# Altium PCB PCB1Good1.PcbDoc
Units mm, origin at the board's own origin, x right, y up, seen from the top; angles counter-clockwise.
Board outline 152.4 x 101.6 mm, 2 copper layers (Top Layer, Bottom Layer); 96 components, 119 nets, 457 pads, 86 vias.
Unrouted connection lines stored in the file: 1.
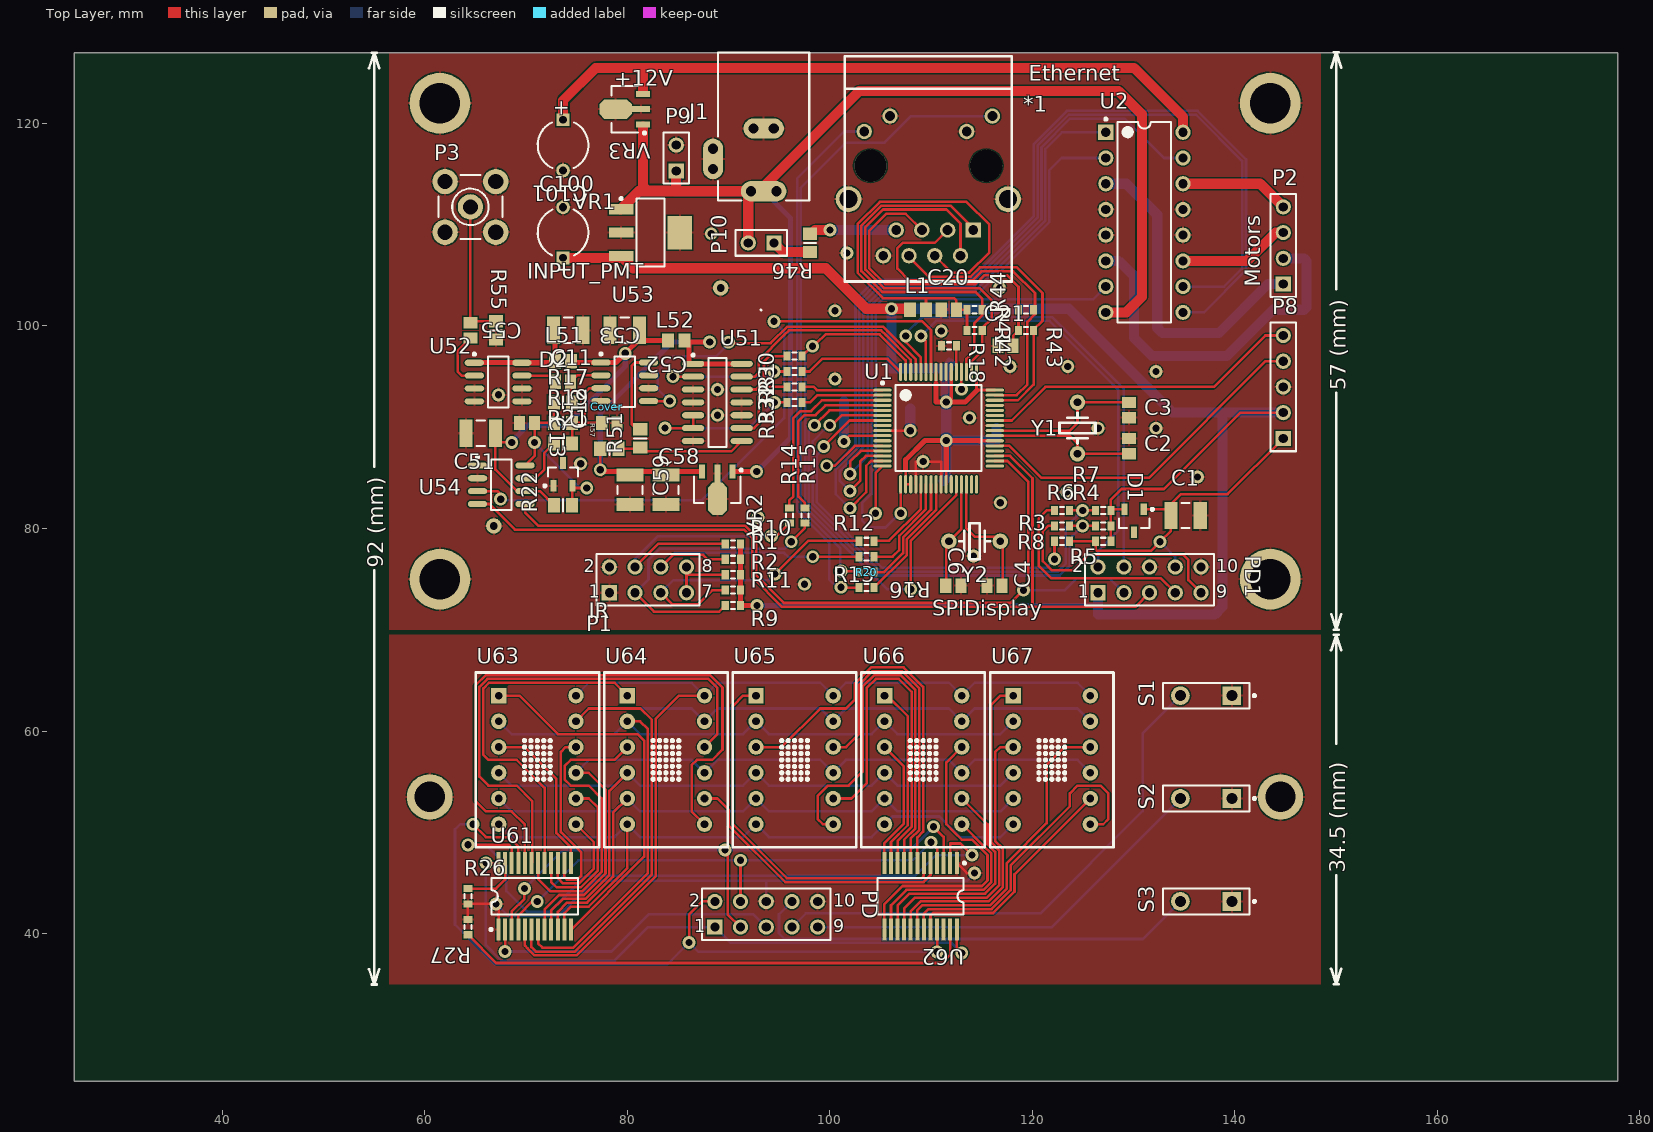
[diagram p0: Top Layer view]
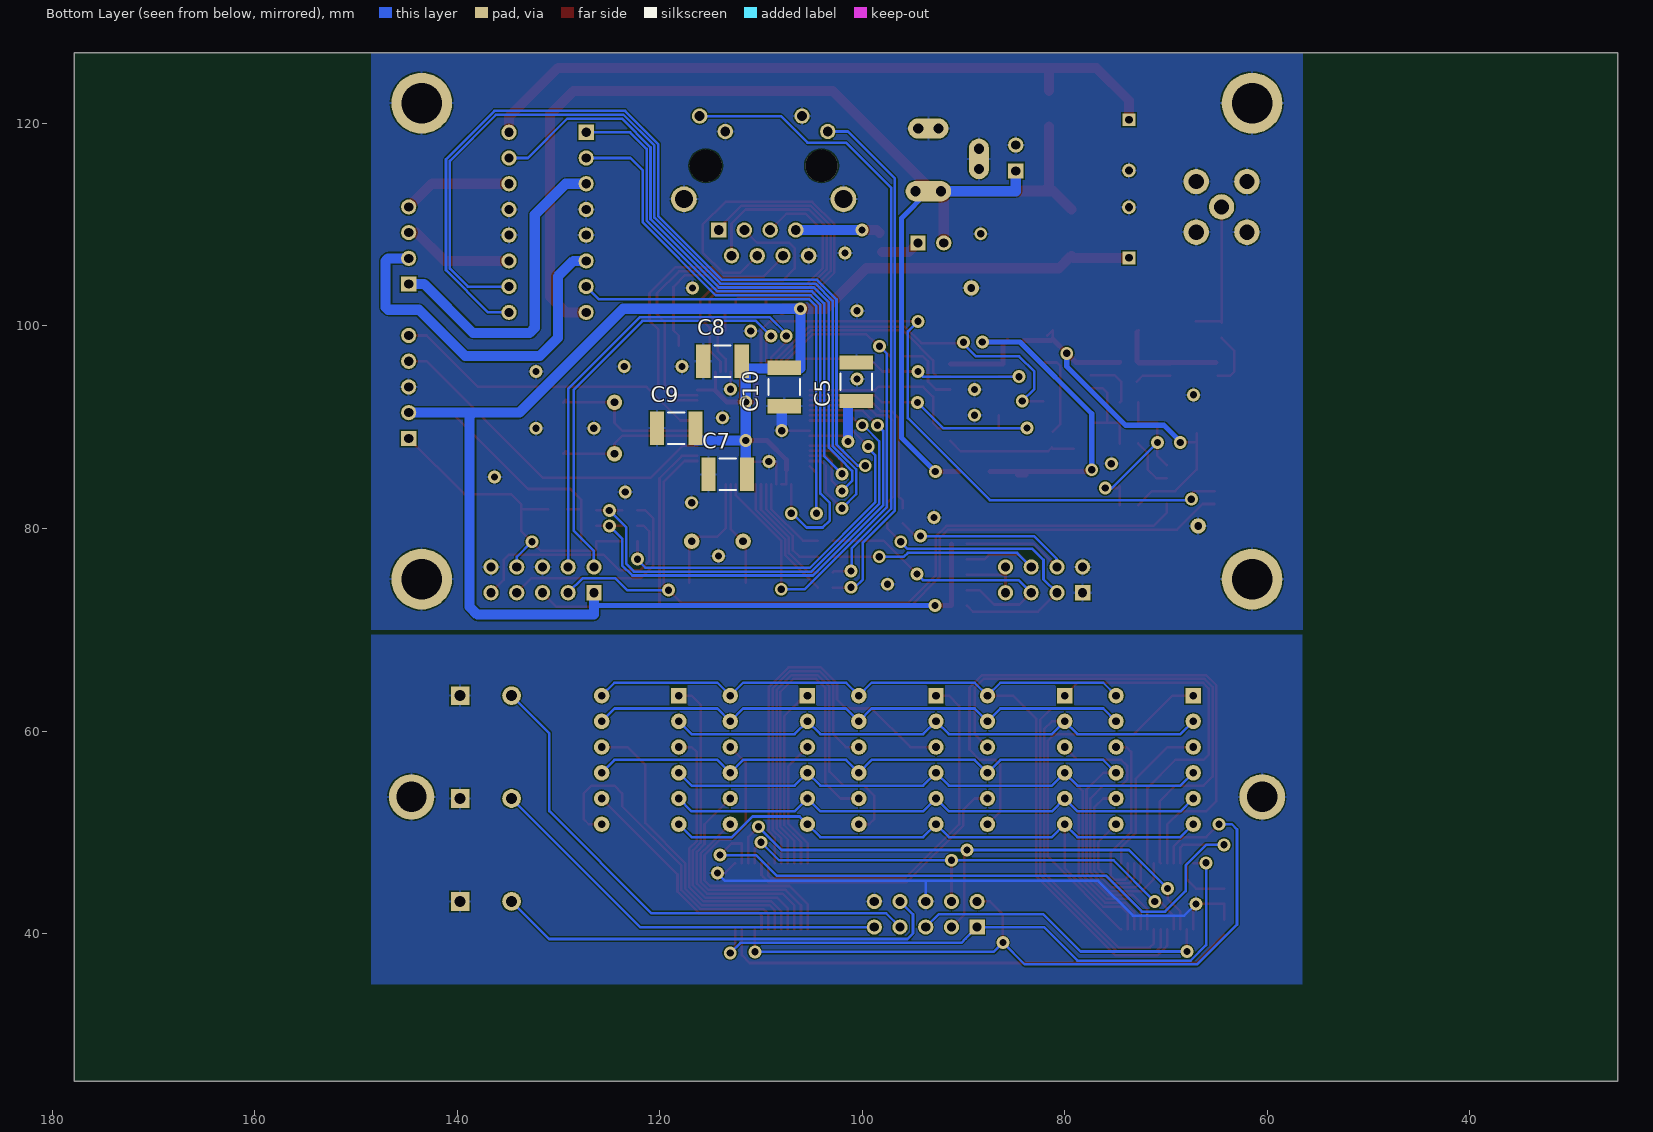
[diagram p1: Bottom Layer view, seen from below]

## Layer stack, top to bottom
Top Layer: signal copper 0.0356
Dielectric: dielectric 0.32, FR-4, Dk 4.8
Bottom Layer: signal copper 0.0356

## Board outline
25.4,25.4 177.8,25.4 177.8,127 25.4,127

## Design rules (kind name [scope] priority, off if disabled: settings)
Clearance [All] p1: gap=0.127
PolygonConnect [All] p1: connectstyle=Relief reliefconductorwidth=0.254 reliefentries=4 polygonreliefangle="90 Angle"
RoutingVias [All] p1: holewidth=0.711 width=1.27 viastyle="Through Hole" minholewidth=0.711 minwidth=1.27 maxholewidth=0.711 maxwidth=1.27
SilkscreenOverComponentPads [All] p1: minsilkscreentomaskgap=0.254
SolderMaskExpansion [All] p1: expansion=0.102
Width [All] p1: maxlimit=2.54 minlimit=0.254 preferedwidth=0.254
27 further rules are at their usual default settings.

## Classes and differential pairs
component class Sheet1: * *1 *2 *3 *4 *5 *6 *7 *8 C1 C2 C3 C4 C5 C6 C7 C8 C9 C10 C11 C12 C13 C51 C52 C53 C55 C58 C59 C100 C101 D1 D2 J1 J2 L51 L52 P1 P2 P3 P8 Q1 Q2 R1 R2 R3 R4 R5 R6 R7 R8 R9 R10 R11 R12 R13 R14 R15 R16 R17 R18 R19 R20 R21 R22 R23 R24 R25 R51 R55 R57 U1 U2 U3 U4 U51 U52 U53 U54 VR1 VR2 VR3 Y1 Y2

## Components (designator, comment, footprint, x,y, rotation, side; value= is the part's Value field where it differs from the comment)
*1 "Component_1" EthernetCON 109.728,115.824 r90 top
C1 "Cap" CAPC3225N 135.128,81.28 r180 top
C2 "Cap" CAPC2012L 129.54,88.138 r270 top
C3 "Cap" CAPC2012L 129.54,91.694 r270 top
C4 "Cap" CAPC2012L 116.259,74.357 r180 top
C5 "Cap" CAPC4532L 100.584,94.488 r90 bottom
C6 "Cap" CAPC2012L 112.195,74.357 r180 top
C7 "Cap" CAPC4532L 113.284,85.344 r180 bottom
C8 "Cap" CAPC4532L 113.792,96.52 r180 bottom
C9 "Cap" CAPC4532L 118.364,89.916 r180 bottom
C10 "Cap" CAPC4532L 107.696,93.98 r90 bottom
C11 "Cap" CAPC2012L 73.66,94.488 r0 top
C12 "Cap" CAPC2012L 78.232,90.424 r180 top
C13 "Cap" CAPC2012L 70.104,90.424 r0 top
C20 "Cap" CAPC2012L 111.76,101.6 r0 top
C21 "Cap" CAPC2012L 117.348,98.044 r0 top
C51 "Cap Pol1" CAPC3225N 65.532,89.408 r180 top
C52 "Cap" CAPC3225N 79.756,99.568 r180 top
C53 "Cap" CAPC3225N 74.168,99.568 r180 top
C55 "Cap" CAPC2012L 64.516,99.568 r270 top
C58 "Cap" CAPC3225N 83.82,83.82 r90 top
C59 "Cap Pol1" CAPC3225N 80.264,83.82 r270 top
C100 "Cap Pol1" CAPPR5-5x5 73.66,109.22 r90 top
C101 "Cap Pol1" CAPPR5-5x5 73.66,117.856 r270 top
Cover "Cover" Cover 77.724,92.456 r0 top
D1 "Diode" SOT95P240-3N 130.048,80.772 r270 top
D2 "AD1580" SOT95P240-3N 73.66,85.344 r90 top
J1 "PWR2.5" KLD-0202 93.472,127 r270 top
L1 "Inductor" INDC2012L 108.712,101.6 r0 top
L51 "Inductor" INDC2012L 73.66,96.52 r0 top
L52 "Inductor" INDC2012L 84.836,98.552 r0 top
P1 "Header 4X2" HDR2X4 78.232,73.66 r0 top
P2 "Header 4" HDR1X4 144.78,104.14 r90 top
P3 "SMB" SMB_V-RJ45 64.516,111.76 r0 top
P8 "Header 5" HDR1X5 144.78,88.9 r90 top
P9 "Header 2" HDR1X2 84.836,115.316 r90 top
P10 "Header 2" HDR1X2 94.488,108.204 r180 top
PD "Header 5X2" HDR2X5 88.646,40.64 r0 top
PD1 "Header 5X2" HDR2X5 126.492,73.66 r0 top
R1 "Res3" RESC1608L 90.424,78.486 r0 top
R2 "Res3" RESC1608L 90.424,76.962 r0 top
R3 "Res3" RESC1608L 122.936,80.264 r180 top
R4 "Res3" RESC1608L 127,80.264 r0 top
R5 "Res3" RESC1608L 127,78.74 r0 top
R6 "Res3" RESC1608L 122.936,81.788 r0 top
R7 "Res3" RESC1608L 127,81.788 r0 top
R8 "Res3" RESC1608L 122.936,78.74 r0 top
R9 "Res3" RESC1608L 90.424,72.39 r0 top
R10 "Res3" RESC1608L 90.424,73.914 r0 top
R11 "Res3" RESC1608L 90.424,75.438 r0 top
R12 "Res3" RESC1608L 103.632,78.74 r0 top
R13 "Res3" RESC1608L 103.632,77.216 r0 top
R14 "Res3" RESC1608L 96.012,81.28 r90 top
R15 "Res3" RESC1608L 97.536,81.28 r90 top
R16 "Res3" RESC1608L 103.632,74.168 r0 top
R17 "Res2" RESC2012N 73.66,92.456 r0 top
R18 "Res3" RESC1608L 111.76,98.044 r0 top
R19 "Res2" RESC2012N 73.66,90.424 r0 top
R20 "Res3" RESC1608L 103.632,75.692 r0 top
R21 "Res2" RESC2012N 73.66,88.392 r0 top
R22 "Res2" RESC2012N 73.66,82.296 r180 top
R26 "Res3" RESC1608L 64.262,43.688 r90 top
R27 "Res3" RESC1608L 64.262,40.64 r270 top
R30 "" RESC1608L 96.52,97.028 r180 top
R31 "" RESC1608L 96.52,95.504 r180 top
R32 "" RESC1608L 96.52,93.98 r180 top
R33 "" RESC1608L 96.52,92.456 r180 top
R41 "Res3" RESC1608L 114.3,101.6 r0 top
R42 "Res3" RESC1608L 114.3,99.568 r0 top
R43 "Res3" RESC1608L 119.38,99.568 r0 top
R44 "Res3" RESC1608L 119.38,101.6 r180 top
R46 "Res3" RESC2012N 98.044,108.204 r270 top
R51 "Res2" RESC2012N 81.28,88.9 r90 top
R55 "Res2" RESC2012N 67.056,99.568 r90 top
R57 "Res2" RESC2012N 78.232,87.884 r0 top
S1 "SW-PB" SPST-2 137.16,63.5 r180 top
S2 "SW-PB" SPST-2 137.16,53.34 r180 top
S3 "SW-PB" SPST-2 137.16,43.18 r180 top
U1 "PIC18F67J60-I/PT" TQFP-PT64_N 110.744,89.916 r0 top
U2 "SN754410NE" NE016 131.064,110.236 r0 top
U51 "SN74S197D" D014_N 88.9,92.456 r0 top
U52 "SA5205A" SOIC127P600-8L 67.252,94.465 r0 top
U53 "AD8561" SOIC127P600-8L 79.756,94.488 r0 top
U54 "AD8400" SOIC127P600-8L 67.564,84.328 r0 top
U61 "STP16C596" DB024 70.866,43.688 r0 top
U62 "STP16C596" DB024 108.966,43.688 r180 top
U63 "BL-M07A571" "LED matrix 7x5" 67.31,63.5 r0 top
U64 "BL-M07A571" "LED matrix 7x5" 80.01,63.5 r0 top
U65 "BL-M07A571" "LED matrix 7x5" 92.71,63.5 r0 top
U66 "BL-M07A571" "LED matrix 7x5" 105.41,63.5 r0 top
U67 "BL-M07A571" "LED matrix 7x5" 118.11,63.5 r0 top
VR1 "Volt Reg" SOT223-4N 82.296,109.22 r0 top
VR2 "Volt Reg" SOT89N#1 88.9,83.82 r270 top
VR3 "Volt Reg" SOT89N#2 79.756,121.412 r180 top
Y1 "XTAL" Quartz 124.46,92.456 r270 top
Y2 "Z" Quartz 116.84,78.74 r180 top

## Footprints (in the part's own frame and the unit in brackets; to place one, negate y for a bottom-side part, rotate by r counter-clockwise, add the part's x,y. Pads: shape width x height; smd on the part's side, far side on the other; paste and mask are expansions set on the pad)
CAPC2012L [mm] "Chip Capacitor, Body 2.0x1.3mm, IPC High Density"
  rect 1.1x1.4 smd: 1(-0.75,0) 2(0.75,0)
  body extent -1.1,-0.72 1.1,0.72, height 1.4
CAPC3225N [mm] "Chip Capacitor, Body 3.2x2.5mm, IPC Medium Density"
  rect 1.3x2.7 smd: 1(-1.45,0) 2(1.45,0)
  silkscreen extent -0.4,-1.25 0.4,1.25, body extent -1.7,-1.35 1.7,1.35, height 1.5
CAPC4532L [mm] "Chip Capacitor, Body 4.5x3.2mm, IPC High Density"
  rect 1.4x3.3 smd: 1(-1.9,0) 2(1.9,0)
  silkscreen extent -0.8,-1.55 0.8,1.55, body extent -2.4,-1.7 2.4,1.7, height 1.4
CAPPR5-5x5 [mm] "Capacitor, Electrolytic, Radial; Body 5 x 5 mm (Dia.xH typ); Pin Spacing 5 mm (typ)"
  rect 1.25x1.25 hole 0.75: 1(-2.5,0)
  round 1.35 hole 0.8: 2(2.5,0)
  silkscreen extent -2.26,-2.5 2.27,2.5
Cover [mil]
  round 60 hole 30: 0(-429.13,-480.32) 1(452.76,444.88)
  body extent -626,-486 646,453, height 181
D014_N [mm] "SOIC, 14-Leads, Body 8.7x3.9mm, Pitch 1.27mm, IPC Medium Density"
  oval 2.2x0.6 smd: 1(-2.4,3.81) 2(-2.4,2.54) 3(-2.4,1.27) 4(-2.4,0) 5(-2.4,-1.27) 6(-2.4,-2.54) 7(-2.4,-3.81) 8(2.4,-3.81) 9(2.4,-2.54) 10(2.4,-1.27) 11(2.4,0) 12(2.4,1.27) 13(2.4,2.54) 14(2.4,3.81)
  silkscreen extent -2.52,-4.4 0.9,4.78, body extent -2,-4.38 2,4.38, height 1.75
DB024 [mm] "SSOP, Plastic; 24 Leads; Body Width 5.3 mm; Pitch 0.65 mm"
  rect 0.4x2.15 smd: 1(-3.575,-3.275) 2(-2.925,-3.275) 3(-2.275,-3.275) 4(-1.625,-3.275) 5(-0.975,-3.275) 6(-0.325,-3.275) 7(0.325,-3.275) 8(0.975,-3.275) 9(1.625,-3.275) 10(2.275,-3.275) 11(2.925,-3.275) 12(3.575,-3.275) 13(3.575,3.275) 14(2.925,3.275) 15(2.275,3.275) 16(1.625,3.275) 17(0.975,3.275) 18(0.325,3.275) 19(-0.325,3.275) 20(-0.975,3.275) 21(-1.625,3.275) 22(-2.275,3.275) 23(-2.925,3.275) 24(-3.575,3.275)
  silkscreen extent -4.45,-3.4 4.25,1.8
EthernetCON [mil] "Ethernet connector w/two LEDs"
  rect 60x60 hole 38: 1(-250,-175)
  round 60 hole 38: 2(-350,-125) 3(-250,-75) 4(-350,-25) 5(-250,25) 6(-350,75) 7(-250,125) 8(-350,175) 9(193,-249) 10(133,-149) 11(193,149) 12(133,249)
  round 100 hole 70: 13(-130,-310) 14(-130,310)
  round 125 hole 125 unplated: 15(0,-225) 16(0,225)
  silkscreen extent -450,-325 425,325, body extent -450,-325 425,325, height 550
HDR1X2 [mm] "Connector; Header; 2 Position"
  rect 1.5x1.5 hole 0.9: 1(0,0)
  round 1.5 hole 0.9: 2(2.54,0)
  silkscreen extent -1.27,-1.27 3.81,1.27
HDR1X4 [mm] "Connector; Header; 4 Position"
  rect 1.5x1.5 hole 0.9: 1(0,0)
  round 1.5 hole 0.9: 2(2.54,0) 3(5.08,0) 4(7.62,0)
  silkscreen extent -1.27,-1.27 8.89,1.27
HDR1X5 [mm] "Connector; Header; 5 Position"
  rect 1.5x1.5 hole 0.9: 1(0,0)
  round 1.5 hole 0.9: 2(2.54,0) 3(5.08,0) 4(7.62,0) 5(10.16,0)
  silkscreen extent -1.27,-1.27 11.43,1.27
HDR2X4 [mm] "Connector; Header; 4x2 Position"
  rect 1.5x1.5 hole 0.9: 1(0,0)
  round 1.5 hole 0.9: 2(0,2.54) 3(2.54,0) 4(2.54,2.54) 5(5.08,0) 6(5.08,2.54) 7(7.62,0) 8(7.62,2.54)
  silkscreen extent -1.27,-1.27 8.89,3.81
HDR2X5 [mm] "Connector; Header; 5x2 Position"
  rect 1.5x1.5 hole 0.9: 1(0,0)
  round 1.5 hole 0.9: 2(0,2.54) 3(2.54,0) 4(2.54,2.54) 5(5.08,0) 6(5.08,2.54) 7(7.62,0) 8(7.62,2.54) 9(10.16,0) 10(10.16,2.54)
  silkscreen extent -1.27,-1.27 11.43,3.81
INDC2012L [mm] "Chip Inductor, Body 2.0x1.2mm, IPC High Density"
  rect 1.2x1.4 smd: 1(-0.8,0) 2(0.8,0)
  body extent -1.1,-0.7 1.1,0.7, height 0.55
KLD-0202 [mm] "DC Power Jack, 2.5mm, KLD Series, PCB Mount"
  oval 2x4.5 all layers, no hole: 1(13.7,0)
  round 1.5 hole 1: 1A(13.7,-1.25) 1B(13.7,1.25) 2A(7.5,-1) 2B(7.5,1) 3A(9.5,-5) 3B(11.5,-5)
  oval 2x4 all layers, no hole: 2(7.5,0)
  oval 4x2 all layers, no hole: 3(10.5,-5)
  silkscreen extent 0,-4.5 14.6,4.5
"LED matrix 7x5" [mil] "LED matrix 7x5"
  rect 60x60 hole 30: 1(0,0)
  round 60 hole 30: 2(0,-100) 3(0,-200) 4(0,-300) 5(0,-400) 6(0,-500) 7(300,-500) 8(300,-400) 9(300,-300) 10(300,-200) 11(300,-100) 12(300,0)
  silkscreen extent -90,-590 390,90, body extent -90,-590 390,90, height 250
NE016 [mm] "DIP, 16-Leads, Row Spacing 7.62mm, Pitch 2.54mm, Body 19.4x6.35mm"
  rect 1.5x1.5 hole 0.9: 1(-3.81,8.89)
  round 1.5 hole 0.9: 2(-3.81,6.35) 3(-3.81,3.81) 4(-3.81,1.27) 5(-3.81,-1.27) 6(-3.81,-3.81) 7(-3.81,-6.35) 8(-3.81,-8.89) 9(3.81,-8.89) 10(3.81,-6.35) 11(3.81,-3.81) 12(3.81,-1.27) 13(3.81,1.27) 14(3.81,3.81) 15(3.81,6.35) 16(3.81,8.89)
  silkscreen extent -3.93,-9.9 2.65,10.31, body extent -3.3,-9.9 3.3,9.9, height 5.08
Quartz [mil]
  round 60 hole 30: 1(0,0) 2(200,0)
  silkscreen extent 40,-70 160,70, body extent -100,-100 300,100, height 90
RESC1608L [mm] "Chip Resistor, Body 1.6x0.8mm, IPC High Density"
  rect 0.7x0.9 smd: 1(-0.75,0) 2(0.75,0)
  silkscreen extent -0.2,-0.35 0.2,0.35, body extent -0.85,-0.48 0.85,0.48, height 0.9
RESC2012N [mm] "Chip Resistor, Body 2.0x1.2mm, IPC Medium Density"
  rect 1.2x1.4 smd: 1(-0.9,0) 2(0.9,0)
  silkscreen extent 0,-0.6 0,0.6, body extent -1.07,-0.7 1.07,0.7, height 0.7
SMB_V-RJ45 [mm] "Connector; SMB Straight"
  round 2.5 hole 1.5: 1(0,0) 2(-2.5,-2.5) 2_1(2.5,-2.5) 2_2(2.5,2.5) 2_3(-2.5,2.5)
  silkscreen extent -3.15,-3.15 3.15,3.15
SOIC127P600-8L [mm] "SOIC, 8-Leads, Body 4.9x3.9mm, Pitch 1.27mm, IPC High Density"
  oval 1.9x0.6 smd: 1(-2.35,1.905) 2(-2.35,0.635) 3(-2.35,-0.635) 4(-2.35,-1.905) 5(2.35,-1.905) 6(2.35,-0.635) 7(2.35,0.635) 8(2.35,1.905)
  silkscreen extent -2.47,-2.5 1,2.88, body extent -2,-2.5 2,2.5, height 1.75
SOT89N#1 [mm] "SOT89, 3-Leads, Body 4.5x2.4 mm, Pitch 1.5mm, Lead Span 4.1mm, IPC Medium Density"
  rect 1.4x0.6 smd: 1(-1.8,1.5) 3(-1.8,-1.5)
  rect 1.8x0.6 smd: 2(-1.6,0)
  oct 3.2x1.9 smd: 2_1(0.9,0)
  silkscreen extent -2.07,-2.3 1.3,2.48, body extent -1.3,-2.3 1.3,2.3, height 1.6
SOT89N#2 [mm] "SOT89, 3-Leads, Body 4.5x2.4 mm, Pitch 1.5mm, Lead Span 4.1mm, IPC Medium Density"
  rect 1.4x0.6 smd: 1(-1.8,1.5) 3(-1.8,-1.5)
  oct 3.2x1.9 smd: 2(0.9,0)
  rect 1.8x0.6 smd: 2_1(-1.6,0)
  silkscreen extent -2.07,-2.3 1.3,2.47, body extent -1.3,-2.3 1.3,2.3, height 1.6
SOT95P240-3N [mm] "SOT23, 3-Leads, Body 2.9x1.3mm, Pitch 0.95mm, Lead Span 2.4mm, IPC Medium Density"
  rect 1.15x0.6 smd: 1(-1.125,0.95) 2(-1.125,-0.95) 3(1.125,0)
  silkscreen extent -1.25,-1.5 0.7,1.93, body extent -0.7,-1.5 0.7,1.5, height 1.14
SOT223-4N [mm] "SOT223, 4-Leads, Body 6.5x3.5mm, Pitch 2.3mm, Lead Span 7mm, IPC Medium Density"
  rect 2.4x1 smd: 1(-2.9,2.3) 2(-2.9,0) 3(-2.9,-2.3)
  rect 2.4x3.3 smd: 4(2.9,0)
  silkscreen extent -3.02,-3.35 1.4,3.47, body extent -1.85,-3.35 1.85,3.35, height 1.7
SPST-2 [mm] "Circuit Breaker; 2 Leads"
  rect 1.85x1.85 hole 1.1: 1(-2.54,0)
  round 1.85 hole 1.1: 2(2.54,0)
  silkscreen extent -4.89,-1.27 4.28,1.27
TQFP-PT64_N [mm] "Thin QFP, 64-Leads, Body 10x10mm, Pitch 0.5mm, IPC Medium Density"
  oval 1.8x0.3 smd: 1(-5.55,3.75) 2(-5.55,3.25) 3(-5.55,2.75) 4(-5.55,2.25) 5(-5.55,1.75) 6(-5.55,1.25) 7(-5.55,0.75) 8(-5.55,0.25) 9(-5.55,-0.25) 10(-5.55,-0.75) 11(-5.55,-1.25) 12(-5.55,-1.75) 13(-5.55,-2.25) 14(-5.55,-2.75) 15(-5.55,-3.25) 16(-5.55,-3.75) 33(5.55,-3.75) 34(5.55,-3.25) 35(5.55,-2.75) 36(5.55,-2.25) 37(5.55,-1.75) 38(5.55,-1.25) 39(5.55,-0.75) 40(5.55,-0.25) 41(5.55,0.25) 42(5.55,0.75) 43(5.55,1.25) 44(5.55,1.75) 45(5.55,2.25) 46(5.55,2.75) 47(5.55,3.25) 48(5.55,3.75)
  oval 0.3x1.8 smd: 17(-3.75,-5.55) 18(-3.25,-5.55) 19(-2.75,-5.55) 20(-2.25,-5.55) 21(-1.75,-5.55) 22(-1.25,-5.55) 23(-0.75,-5.55) 24(-0.25,-5.55) 25(0.25,-5.55) 26(0.75,-5.55) 27(1.25,-5.55) 28(1.75,-5.55) 29(2.25,-5.55) 30(2.75,-5.55) 31(3.25,-5.55) 32(3.75,-5.55) 49(3.75,5.55) 50(3.25,5.55) 51(2.75,5.55) 52(2.25,5.55) 53(1.75,5.55) 54(1.25,5.55) 55(0.75,5.55) 56(0.25,5.55) 57(-0.25,5.55) 58(-0.75,5.55) 59(-1.25,5.55) 60(-1.75,5.55) 61(-2.25,5.55) 62(-2.75,5.55) 63(-3.25,5.55) 64(-3.75,5.55)
  silkscreen extent -5.67,-4.25 4.25,4.57, body extent -5,-5 5,5, height 1.2

## Part data
C1 C2 C3 C4 C5 C6 C7 C8 C9 C10 C11 C12 C13 C20 C21 C52 C53 C55 C58: "Capacitor"
C51 C59 C100 C101: "Polarized Capacitor (Radial)"
Cover: library part Component_1
D1: "Default Diode"
D2: library part "D Zener", "Zener Diode"
J1: "Low Voltage Power Supply Connector"
P1: "Header, 4-Pin, Dual row"
P2: "Header, 4-Pin"
P3: "SMB Straight Connector"
P8: "Header, 5-Pin"
P9 P10: "Header, 2-Pin"
PD PD1: "Header, 5-Pin, Dual row"
R1 R2 R3 R4 R5 R6 R7 R8 R9 R10 R11 R12 R13 R14 R15 R16 R17 R18 R19 R20 R21 R22 R26 R27 R41 R42 R43 R44 R46 R51 R55 R57: "Resistor"
R30 R31 R32 R33: library part Res3, "Resistor"
S1 S2 S3: "Switch"
U1: "High Performance, 1-Mbit Flash Microcontroller with Ethernet, 128K Flash, 64-Pin TQFP, Industrial Temperature Range"
U2: "Quadruple Half-H Driver"
U51: "100-MHz Presettable Decade or Binary Counter / Latch"
U52: "Wide-band high-frequency amplifier"
U53: "Ultrafast 7 ns  Single Supply Comparator"
U54: "Digital Potentiometers"
VR1 VR2 VR3: "Voltage Regulator"
Y1: "Crystal Oscillator"
Y2: library part XTAL, "32768 kHz"

## Free pads (board coordinates)
  round 4.5 hole 3: 0(60.5,53.5) 0(144.5,53.5)
  round 6 hole 4: 0(61.5,75) 0(61.5,122) 0(143.5,75) 0(143.5,122)

## Via types
v1: diameter 1.27, hole 0.711, Top Layer to Bottom Layer, 85 vias
v2: diameter 1.27, hole 0.711, Top Layer to Bottom Layer, tented top, 1 vias

## Nets (pads, with @x,y where several pads share a name; then routed paths per layer and width w, separated by ;. In a path a pad name is that pad's centre, name@x,y a point inside that pad or via, vN(x,y) a via of type N, cw(c..) or ccw(c..) an arc to the next point about the centre after c; other vN are vias at no path point)
3.3V: C7.2 C8.2 C9.2 C10.2 C100.1 D1.2 L1.1 P8.2 PD1.1 R1.2 R2.2 R4.2 R5.2 R7.2 R9.2 R10.2 R11.2 U1.18 U1.19 U1.26 U1.38 U1.48 U1.49 U1.54 U1.57 VR1.3 | length 244
  Top Layer w0.254: 107.494,85.789 U1.18 U1.19 ; U1.26 111.5,84.372 111.5,85.8 ; U1.49@114.494,94.802 U1.49 ; R5.2 R4.2 R7.2 ; D1.2 127.859,81.897 R7.2 ; P8.2 140.54,91.44 133,83.9 128.8,83.9 127.75,82.85 R7.2
  Top Layer w0.3: 110.494,94.3 U1.57 ; 111.994,93.1 111.994,92.5 U1.54 ; 114.494,93.7 U1.49 ; 114.528,93.666 U1.48 ; 114.8,88.666 U1.38
  Top Layer w0.5: R1.2 R2.2 R11.2 R10.2 R9.2 v1(92.8,72.39) ; 107.494,85.789 107.494,86.794 109.4,88.7 v1(111.5,88.7) ; 110.494,94.3 110.494,92.5 111.994,92.5 113.362,92.5 114.528,93.666 ; 111.5,85.8 v1(111.5,88.7) ; 114.8,88.666 114.766,88.7 v1(111.5,88.7)
  Top Layer w1: C100.1 79.146,106.72 79.346,106.92 80.566,105.7 99.6,105.7 103.6,101.7 v1(106.1,101.7) ; v1@106.2,101.6 v1(106.1,101.7) ; L1.1 107.812,101.7 v1(106.1,101.7)
  Bottom Layer w0.5: v1(92.8,72.39) 126.482,72.39 126.492,72.4
  Bottom Layer w0.508: C8.2@111.76,95.8 C8.2@111.76,96.652 ; C8.2@111.892,96.292 C8.2
  Bottom Layer w1: C7.2@111.252,84.704 111.5,84.952 v1(111.5,88.7) ; C8.2@111.76,95.8 106.1,95.8 v1(106.1,101.7) 123.6,101.7 133.86,91.44 138.46,91.44 ; C8.2@111.892,96.292 111.5,95.9 111.5,93.1 v1(111.5,88.7) ; C9.2 116.464,88.7 v1(111.5,88.7) ; PD1.1 126.492,72.4 126.492,71.5 138,71.5 138.76,72.26 138.76,91.14 138.46,91.44 ; P8.2 138.46,91.44
  other v1: 111.5,92.5
5V: C101.1 U2.16 VR3.3 | length 70.2
  Top Layer w1: C101.1 73.66,122.26 76.876,125.476 81.556,125.476 ; VR3.3@81.556,123.2 81.556,125.476 ; U2.16 134.874,120.65 130.048,125.476 81.556,125.476
5VHF: C58.2 C59.1 L52.2 R57.1 U51.1 U51.14 VR2.3 | length 43.4
  Top Layer w0.254: R57.1 v1(77.332,85.8) 77.332,85.368 v1@77.43,85.27
  Top Layer w0.5: v1(77.332,85.8) 77.512,85.62 VR2.3 ; C58.2@84.17,85.62 C58.2 C58.2@84.67,85.27 ; L52.2 85.763,98.425 L52.2@86.116,98.425 ; v1(88.138,98.425) L52.2@86.116,98.425 ; U51.14 86.116,96.266 L52.2@86.116,98.425
  Bottom Layer w0.254: v1(77.332,85.8) 77.356,85.8 v1@77.4,85.844
  Bottom Layer w0.5: v1(77.332,85.8) 77.332,91.332 84.425,98.425 v1(88.138,98.425)
12V: J1.1 J1.1A J1.1B P9.1 P10.2 U2.8 VR1.1 VR2.1 VR3.1 | length 140.2
  Top Layer w0.5: VR2.1 v1(92.78,85.62) v1@92.8,85.6
  Top Layer w0.508: J1.1A J1.1
  Top Layer w1: VR1.1@79.346,111.52 81.126,113.3 84.2,113.3 ; VR3.1@81.556,119.7 81.556,113.8 81.976,113.38 84.12,113.38 84.2,113.3 ; P9.1 84.8,115.28 84.8,113.3 ; P10.2 91.948,113.026 J1.1A 84.8,113.3 ; J1.1 93.472,113.772 102.89,123.19 128.524,123.19 130.81,120.904 130.81,102.87 129.286,101.346 U2.8 ; 84.2,113.3 84.8,113.3
  Bottom Layer w0.5: J1.1A J1.1 96.1,110.672 96.1,88.94 v1(92.78,85.62)
  Bottom Layer w1: P9.1 84.836,113.3 J1.1
COUNTERRESET: U1.62 U51.13 | length 21.7
  Top Layer w0.254: U51.13 92.596,94.996 93,95.4 93,96.6 95.5,99.1 95.962,99.562 105.077,99.562 105.539,99.1 107.994,96.645 U1.62
D0: R33.2 U51.5 U51.6 | length 17.2
  Top Layer w0.254: v1(83.72,89.916) U51.6 U51.5 ; v1(94.544,92.456) R33.2
  Bottom Layer w0.254: v1(83.72,89.916) 92.004,89.916 v1(94.544,92.456)
D1: R32.2 U51.9 | length 8.7
  Top Layer w0.254: U51.9@92.316,89.916 U51.9 92.516,89.916 93,90.4 93,93 93.98,93.98 R32.2
D2: R31.2 U51.2 | length 13.5
  Top Layer w0.254: v1(84.504,94.996) U51.2 ; v1(94.504,95.504) R31.2
  Bottom Layer w0.254: v1(84.504,94.996) 93.996,94.996 v1(94.504,95.504)
D3: R30.2 U51.12 | length 7
  Top Layer w0.254: U51.12 92.726,93.726 93.5,94.5 93.5,96.5 94.028,97.028 R30.2
DISP_LE: PD1.2 U1.59 | length 45
  Top Layer w0.254: v1(109,99) 109.494,98.506 U1.59
  Bottom Layer w0.254: v1(109,99) 110.5,100.5 121.7,100.5 128.5,93.7 128.5,79.8 126.492,77.792 PD1.2
DISPOFF: PD1.4 U1.60 | length 47.1
  Top Layer w0.254: v1(107.5,99) 107.5,98.4 108.994,96.906 U1.60
  Bottom Layer w0.254: v1(107.5,99) 107.5,99.25 109.131,100.881 121.919,100.881 129.032,93.768 PD1.4
ENABLECOUNT: U1.61 U53.5 | length 35.7
  Top Layer w0.254: U53.5 v1(84.201,92.583) ; v1@90,98.679 90.379,98.3 94.161,98.3 95.804,99.943 96.642,99.943 105.235,99.943 105.678,99.5 108.494,96.684 U1.61
  Bottom Layer w0.254: v1(84.201,92.583) 83,93.784 83,95.5 84.5,97 88.768,97 90,98.232 v1(90,98.4)
GND: *1.8 *1.10 *1.11 *1.13 *1.14 C1.1 C2.1 C3.2 C4.2 C5.2 C6.1 C7.1 C8.1 C9.1 C10.1 C12.1 C13.1 C20.1 C21.1 C51.2 C52.2 C53.1 C58.1 C59.2 C100.2 C101.2 Cover.0 Cover.1 D2.1 J1.2 J1.2A J1.2B J1.3 J1.3A J1.3B P1.1 P1.2 P3.2 P3.2_1 P3.2_2 P3.2_3 P8.3 P9.2 pad.0 PD1.6 PD1.10 PD.6 PD.10 R18.1 R26.1 R27.1 R55.1 S1.1 S2.1 S3.1 U1.9 U1.20 U1.25 U1.41 U1.45 U1.52 U1.55 U1.56 U2.4 U2.5 U2.12 U2.13 U51.3 U51.4 U51.7 U51.10 U51.11 U52.3 U52.4 U52.5 U52.6 U53.4 U53.6 U54.1 U54.2 U61.1 U62.1 VR1.2 VR1.4 VR2.2 VR2.2_1 VR3.2 VR3.2_1 | length 74.6
  Top Layer w0.254: R27.1 R26.1 v1(67.044,42.938) 67.291,42.691 U61.1 ; U1.9 v1@107.946,89.666 ; U1.20 108.494,85.587 108.498,85.591 108.498,86.614 v1(109.22,86.614) 110.994,86.614 U1.25 ; U62.1@112.541,46.959 113.532,45.968 v1(114.3,45.974) ; U1.52 112.994,93.756 v1(113,93.75)
  Bottom Layer w0.254: v1(67.044,42.938) 68.199,41.783 73.279,41.783 76.708,45.212 93.726,45.212 ; PD.6 93.726,45.212 ; C10.1 C10.1@107.95,91.826 ; v1(114.3,45.974) 113.538,45.212 98.806,45.212 93.726,45.212
  Bottom Layer w1: v1(107.95,89.662) C10.1@107.95,91.826
  other v1: 97.5,74.5 114.2,77.3 92.9,81.1 116.84,82.55 123.4,83.6 136.3,85.1 75.4,86.4 126.5,89.9 132.2,89.9 113.792,90.932 88.9,91.186 67.3,93.2 88.9,93.726 100.5,94.75 132.2,95.5 117.8,96 123.5,96 111,99.5 100.5,101.5 116.75,103.75 101.7,107.2 88.3,109.1
INPUT: C55.1 P3.1 R55.2 | length 14
  Top Layer w0.254: P3.1 C55.1 64.666,100.468 R55.2
Net*1_1: *1.1 R41.2 U1.51 | length 38.4
  Top Layer w0.254: U1.51 113.494,96.744 114.25,97.5 114.25,100.25 115.05,101.05 115.05,102.7 114.393,103.357 109.682,103.357 105.182,103.357 103.124,105.415 103.124,109.913 105.092,111.881 111.924,111.881 114.173,109.632 *1.1
Net*1_2: *1.2 R42.2 U1.50 | length 39.7
  Top Layer w0.254: *1.2 112.903,110.109 111.512,111.5 105.25,111.5 103.505,109.755 103.505,105.573 105.34,103.738 109.16,103.738 114.762,103.738 116,102.5 116,100.75 115.05,99.8 115.05,97.55 113.994,96.494 U1.50
Net*1_3: *1.3 R44.1 U1.47 | length 36
  Top Layer w0.254: 107.832,104.5 111.719,104.5 112.078,104.5 114.078,104.5 114.979,105.401 118.099,105.401 120.262,103.238 120.262,101.176 119.5,100.414 119.5,97.813 119.5,94.227 118.439,93.166 U1.47 ; 107.832,104.512 106.68,105.664 106.68,107.696 107.188,108.204 110.363,108.204 *1.3
Net*1_4: *1.4 C20.2 L1.2 R41.1 R42.1 | length 45.2
  Top Layer w0.254: L1.2@109.5,101.612 109.5,102.75 ; *1.4 112.035,105.262 113.762,105.262 115.75,107.25 115.75,110 113.488,112.262 104.934,112.262 102.743,110.071 102.743,105.257 105.25,102.75 109.5,102.75 ; R42.1 113.55,101.45 113.4,101.6 C20.2 112.5,101.61 112.5,102.5 112.25,102.75 109.5,102.75
Net*1_5: *1.5 C21.2 R43.1 R44.2 | length 32.5
  Top Layer w0.254: *1.5 107.5,111.067 105.567,111.067 103.886,109.386 103.886,105.73 105.497,104.119 114.369,104.119 115.27,105.02 117.48,105.02 118.63,103.87 R44.2 R43.1 118.098,99.036 C21.2
Net*1_6: *1.6 R43.2 U1.46 | length 29.4
  Top Layer w0.254: *1.6 107.823,106.807 109.725,104.905 ; 109.725,104.881 111.877,104.881 112.235,104.881 113.92,104.881 114.821,105.782 118.468,105.782 121,103.25 121,100.5 120.13,99.63 120.13,98.001 120.13,94.222 118.574,92.666 U1.46
Net*1_7: *1.7 R46.1 | length 8.4
  Top Layer w1: R46.1@98.295,109.205 98.564,109.474 v1(100.026,109.474)
  Bottom Layer w1: v1(100.026,109.474) *1.7
Net*1_9: *1.9 R20.1 | length 63.5
  Top Layer w0.254: v1(101.1,75.8) 102.774,75.8 R20.1
  Bottom Layer w0.254: v1@101.051,75.751 101.051,78.049 97.149,81.951 97.149,113.659 101.6,118.11 105.41,118.11 108.026,120.726 *1.9 ; *1.9@115.824,120.65 *1.9@116.078,120.396
Net*1_12: *1.12 R16.1 | length 52.7
  Top Layer w0.254: v1(101.1,74.2) 101.132,74.168 R16.1
  Bottom Layer w0.254: v1(101.1,74.2) 100.7,74.2 99.933,74.967 99.933,78.6 96.768,81.765 96.768,114.548 101.422,119.202 *1.12
NetC1_2: C1.2 D1.1 P8.1 PD1.8 R5.1 R8.2 | length 34.2
  Top Layer w0.254: R8.2 R5.1 126.25,77.95 126.4,77.8 131.7,77.8 v1(132.6,78.7) 133.678,79.778 C1.2 C1.2@133.678,81.4 ; D1.1 C1.2@133.569,81.897 ; C1.2@133.678,81.788 C1.2@133.678,81.4 ; P8.1 139.28,83.4 134.66,83.4 133.678,82.418 C1.2@133.678,81.4
  Bottom Layer w0.254: v1(132.6,78.7) 134.112,77.188 PD1.8
NetC2_2: C2.2 U1.39 Y1.2 | length 14.7
  Top Layer w0.254: U1.39 123.686,89.166 124.46,88.392 Y1.2 C2.2@129.298,87.376 ; C2.2@129.298,87.63 C2.2
NetC3_1: C3.1 U1.40 Y1.1 | length 15.7
  Top Layer w0.254: U1.40 123.702,89.666 124.46,90.424 Y1.1 C3.1@129.274,92.456 ; C3.1@129.274,92.71 C3.1
NetC4_1: C4.1 U1.30 Y2.1 | length 12.4
  Top Layer w0.254: U1.30 113.494,80.006 114.3,79.2 116.38,79.2 117.082,78.498 C4.1@117.082,74.667
NetC5_1: C5.1 U1.10 | length 8
  Top Layer w0.254: v1(101.4,88.6) 101.966,89.166 U1.10 U1.10@105.182,89.154
  Bottom Layer w1: v1(101.4,88.6) C5.1@101.4,92.6
NetC6_2: C6.2 U1.29 Y2.2 | length 10.3
  Top Layer w0.254: C6.2@111.518,74.667 111.518,78.498 Y2.2 112.994,79.974 U1.29
NetC11_1: C11.1 U52.7 | length 3.6
  Top Layer w0.254: U52.7 72.298,95.1 C11.1
NetC11_2: C11.2 R17.2 U53.2 | length 5.4
  Top Layer w0.254: R17.2 74.41,92.606 C11.2 75.045,95.123 U53.2
NetC12_2: C12.2 R19.2 R21.2 U53.3 | length 9.7
  Top Layer w0.254: R21.2 R19.2 C12.2 ; 75.8,90.424 75.8,93.4 76.253,93.853 U53.3
NetC13_2: C13.2 D2.2 R17.1 R19.1 R22.1 U54.8 | length 19
  Top Layer w0.254: U54.8@69.914,86.314 U54.8 70.854,87.173 v1(70.854,88.5) C13.2 R19.1 ; R19.1@72.71,90.374 R19.1 ; R17.1 R19.1 ; R22.1 D2.2@74.56,84.169 ; D2.2 74.829,84 v1(76,84)
  Bottom Layer w0.254: v1(70.854,88.5) 75.354,84 v1(76,84)
NetC51_1: C51.1 C52.1 L51.2 L52.1 R22.2 U53.1 U54.6 | length 40.8
  Top Layer w0.254: C51.1 C51.1@66.982,88.5 ; v1@68.8,88.5 v1(68.6,88.5) C51.1@66.982,88.5 ; R22.2 71.363,83.693 U54.6 69.107,83.693 66.982,85.818 C51.1@66.982,88.5 ; L51.2 L51.2@74.587,96.393 ; U53.1@77.221,96.451 77.279,96.393 U53.1 ; C52.1@81.36,98.552 81.206,98.706 C52.1 C52.1@81.714,99.06
  Top Layer w0.5: L51.2@74.587,96.393 U53.1@77.279,96.393 ; U53.1 78.893,96.393 v1(79.8,97.3) C52.1@81.206,98.706 ; C52.1@81.36,98.552 L52.1
  Bottom Layer w0.254: v1(68.6,88.5) 68.7,88.4 v1@68.7,88.7
  Bottom Layer w0.5: v1@68.7,88.7 70.2,90.2 74,90.2 79.8,96 v1(79.8,97.3)
NetC53_2: C53.2 L51.1 U52.1 U52.8 | length 11.6
  Top Layer w0.254: U52.8@70.061,96.266 U52.8@70.315,96.52 ; L51.1@72.71,96.37 L51.1 ; C53.2 C53.2@72.86,99.426
  Top Layer w0.5: U52.1@65.087,96.393 U52.8@69.934,96.393 ; U52.8 L51.1@72.71,96.37 ; L51.1 C53.2@72.86,99.426
NetC55_2: C55.2 U52.2 | length 5.7
  Top Layer w0.254: C55.2 63.246,97.548 63.246,95.504 63.65,95.1 U52.2
NetP1_3: P1.3 R9.1 R15.1 | length 31.1
  Top Layer w0.254: P1.3 82.632,71.8 89.084,71.8 R9.1 ; v1@96.266,78.74 96.226,78.7 v1(96.2,78.7) 97.536,80.036 R15.1
  Bottom Layer w0.254: P1.3 82.1,74.988 82.1,76.9 83.2,78 95.526,78 96.226,78.7 v1(96.2,78.7)
NetP1_4: P1.4 R1.1 R14.1 | length 27.3
  Top Layer w0.254: P1.4 83.058,78.486 R1.1 ; v1(94.234,79.248) 94.73,79.248 R14.1
  Bottom Layer w0.254: P1.4 80.772,76.972 83.048,79.248 v1(94.234,79.248)
NetP1_5: P1.5 R10.1 R12.1 | length 29.1
  Top Layer w0.254: P1.5 84.472,72.5 86.986,72.5 88.4,73.914 R10.1 ; v1(94.6,75.5) 97.9,78.8 R12.1@102.882,78.8
  Bottom Layer w0.254: P1.5 84.552,74.9 87,74.9 94,74.9 v1(94.6,75.5)
NetP1_6: P1.6 R2.1 R13.1 | length 27.3
  Top Layer w0.254: P1.6 84.512,77.4 87.5,77.4 87.938,76.962 R2.1 ; v1(98.316,77.216) R13.1
  Bottom Layer w0.254: P1.6 84.712,77.6 95.5,77.6 95.884,77.216 v1(98.316,77.216)
NetP1_7: P1.7 P1.8 R11.1 | length 6.4
  Top Layer w0.254: P1.7 P1.8 ; 85.852,75.438 86.614,75.438 R11.1
NetP2_1: P2.1 U2.3 | length 32.2
  Bottom Layer w1: U2.3 129.286,114.046 132.334,110.998 132.334,99.822 132.842,99.314 138.43,99.314 143.256,104.14 P2.1
NetP2_2: P2.2 U2.6 | length 36.2
  Bottom Layer w1: U2.6 128.524,106.426 130.048,104.902 130.048,98.806 131.826,97.028 139.192,97.028 143.764,101.6 146.812,101.6 147.066,101.854 147.066,106.426 146.812,106.68 P2.2
NetP2_3: P2.3 U2.11 | length 11.1
  Top Layer w1: U2.11 141.224,106.426 144.018,109.22 P2.3
NetP2_4: P2.4 U2.14 | length 10.9
  Top Layer w1: U2.14 142.494,114.046 P2.4
NetP8_4: P8.4 U1.37 | length 34.6
  Top Layer w0.254: U1.37 117.734,88.166 120.9,85 131.5,85 143.02,96.52 P8.4
NetP8_5: P8.5 U1.42 | length 32
  Top Layer w0.254: U1.42 117.966,90.666 121.28,93.98 127.793,93.98 137.922,93.98 143.002,99.06 P8.5
NetP10_1: P10.1 R46.2 | length 3.9
  Top Layer w1: P10.1 95.388,107.304 R46.2
NetPD1_7: PD1.7 R6.1 | length 21.1
  Top Layer w0.254: R6.1 121.412,81.788 120.65,81.026 120.65,76.296 121.846,75.1 132.672,75.1 PD1.7
NetPD1_9: PD1.9 R3.2 | length 23.8
  Top Layer w0.254: R3.2 121.564,80.264 121.031,79.731 121.031,76.769 121.9,75.9 124,75.9 125.5,77.4 134.904,77.4 135.4,76.904 135.4,74.912 PD1.9 PD1.9@136.652,73.848
NetPD_1: PD.1 U61.24 U62.24 | length 61.9
  Top Layer w0.254: v1(66.04,46.99) 66.067,46.963 U61.24 ; U62.24 112.541,38.589 v1(113.03,38.1)
  Bottom Layer w0.254: v1(66.04,46.99) 66.04,38.862 67.56,37.342 78.744,37.342 82.042,40.64 PD.1 89.789,39.497 90.196,39.09 106.654,39.09 110.223,39.09 112.04,39.09 v1(113.03,38.1)
NetPD_2: PD.2 U61.21 U62.21 | length 77.3
  Top Layer w0.254: v1(64.77,50.8) 66.04,49.53 68.326,49.53 69.241,48.615 U61.21 ; v1(86.106,39.116) 86.106,41.91 87.376,43.18 PD.2 ; v1@110.49,38.1 v1(110.591,38.201) U62.21
  Bottom Layer w0.254: v1(64.77,50.8) 63.5,50.8 62.992,50.292 62.992,40.894 66.925,36.961 83.951,36.961 v1(86.106,39.116) 86.106,38.862 86.36,38.862 87.021,38.201 99.984,38.201 v1(110.591,38.201)
NetPD_3: PD.3 U61.3 U62.3 | length 59.9
  Top Layer w0.254: U61.3 68.591,42.175 69.85,43.434 v1(69.85,44.45) ; v1(89.662,48.26) 89.662,47.752 89.916,47.752 89.916,41.91 PD.3 ; v1(110.236,50.546) 111.241,49.541 U62.3
  Bottom Layer w0.254: v1(69.85,44.45) 73.66,48.26 v1(89.662,48.26) 107.95,48.26 v1(110.236,50.546)
NetPD_4: PD.4 U61.4 U62.4 | length 51.5
  Top Layer w0.254: U61.4 69.241,41.809 70.612,43.18 v1(71.12,43.18) ; PD.4 v1(91.186,47.244) ; v1(109.982,49.022) 110.591,48.413 U62.4
  Bottom Layer w0.254: v1(71.12,43.18) 75.184,47.244 v1(91.186,47.244) 108.204,47.244 v1(109.982,49.022)
NetPD_5: PD.5 U61.2 | length 30
  Top Layer w0.254: v1(67.941,38.231) U61.2
  Bottom Layer w0.254: v1(67.941,38.231) 78.431,38.231 82.11,41.91 92.456,41.91 PD.5
NetPD_7: PD.7 S1.2 | length 52.3
  Bottom Layer w0.254: PD.7 97.626,42 120.8,42 130.9,52.1 130.9,59.78 S1.2
NetPD_8: PD.8 S3.2 | length 45.1
  Bottom Layer w0.254: PD.8 94.986,41.9 94.986,40.014 95.529,39.471 130.911,39.471 S3.2
NetPD_9: PD.9 S2.2 | length 41.1
  Bottom Layer w0.254: PD.9 121.92,40.64 S2.2
NetR3_1: R3.1 R4.1 U1.5 | length 51.7
  Top Layer w0.254: v1(98.5,90.2) 99.966,91.666 U1.5 ; R3.1 v1(124.968,80.264) R4.1
  Bottom Layer w0.254: v1@98.65,90.35 97.938,89.638 97.938,82.284 104.859,75.363 122.694,75.363 123.698,76.367 123.698,78.994 v1(124.968,80.264)
NetR6_2: R6.2 R7.1 U1.6 | length 50.6
  Top Layer w0.254: v1(100,90.2) 100.2,90.2 101.166,91.166 U1.6 ; R6.2 v1(124.968,81.788) R7.1
  Bottom Layer w0.254: v1@100,90 99.7,90 98.319,88.619 98.319,82.442 105.017,75.744 122.536,75.744 123.317,76.525 123.317,80.137 v1(124.968,81.788)
NetR8_1: R8.1 U1.7 | length 41.2
  Top Layer w0.254: v1@99.529,87.971 v1(99.4,88.1) 101.966,90.666 U1.7 ; v1@122.174,76.962 v1(122.186,76.974) R8.1
  Bottom Layer w0.254: v1(99.4,88.1) 99.4,87.9 98.7,87.2 98.7,82.6 105.175,76.125 121.412,76.125 122.186,76.899 v1(122.186,76.974)
NetR12_2: R12.2 U1.21 | length 8.3
  Top Layer w0.254: R12.2@104.382,78.8 105.845,78.8 108.994,81.949 U1.21
NetR13_2: R13.2 U1.22 | length 10.3
  Top Layer w0.254: R13.2 106.2,77.216 106.857,77.873 106.857,79.273 109.494,81.91 U1.22
NetR14_2: R14.2 U1.3 | length 18.6
  Top Layer w0.254: R14.2 96.012,82.796 96.4,83.184 96.4,90.9 97.1,91.6 98.161,91.6 99.227,92.666 U1.3
NetR15_2: R15.2 U1.4 | length 17.8
  Top Layer w0.254: R15.2 97.536,82.518 96.9,83.154 96.9,90.6 97.5,91.2 98.6,91.2 99.566,92.166 U1.4
NetR16_2: R16.2 U1.24 | length 12.7
  Top Layer w0.254: R16.2 104.384,74.168 107.619,77.403 107.619,78.958 110.494,81.833 U1.24
NetR18_2: R18.2 U1.53 | length 2.6
  Top Layer w0.254: U1.53 R18.2@112.494,98.044
NetR20_2: R20.2 U1.23 | length 11.6
  Top Layer w0.254: R20.2 105.37,75.692 107.238,77.56 107.238,79.116 109.994,81.872 U1.23
NetR21_1: R21.1 U54.7 | length 5.9
  Top Layer w0.254: U54.7@70.637,84.963 U54.7 70.963,84.963 71.8,85.8 71.8,87.432 R21.1
NetR26_2: R26.2 U61.23 | length 5.7
  Top Layer w0.254: R26.2 67.044,44.438 67.941,45.335 U61.23
NetR27_2: R27.2 U62.23 | length 51.6
  Top Layer w0.254: R27.2 67.052,37.1 111.113,37.1 111.891,37.878 U62.23
NetR30_1: R30.1 U1.28 U1.63 | length 56
  Top Layer w0.254: R30.1 98.242,98 v1(98.3,98) ; v1@98,97.6 98.7,98.3 99.581,99.181 104.919,99.181 107.494,96.606 U1.63 ; v1(108,74) 108,78.8 112.494,83.294 U1.28
  Bottom Layer w0.254: v1(98.3,98) 98.211,97.911 97.557,97.257 97.557,82.127 105.684,74 v1(108,74)
NetR31_1: R31.1 U1.64 | length 11.1
  Top Layer w0.254: R31.1@97.516,95.75 R31.1 98.004,95.504 99.25,96.75 105.71,96.75 U1.64
NetR32_1: R32.1 U1.1 | length 8.1
  Top Layer w0.254: R32.1 98.42,93.98 98.734,93.666 U1.1
NetR33_1: R33.1 U1.2 | length 8.2
  Top Layer w0.254: R33.1 98.056,92.456 98.766,93.166 U1.2
NetR51_1: R51.1 R57.2 U51.8 | length 12.8
  Top Layer w0.254: R57.2 81.164,87.884 R51.1 81.65,87.63 90.284,87.63 U51.8
NetR51_2: R51.2 U53.8 | length 8.5
  Top Layer w0.254: R51.2@81.2,89.546 80.438,90.308 80.438,96.059 80.772,96.393 U53.8@81.979,96.393
NetU1_12: U1.12 U2.9 | length 96.6
  Top Layer w0.254: v1(99.7,86.2) 99.7,86.6 100.1,86.2 100.5,86.2 102.466,88.166 U1.12
  Bottom Layer w0.254: v1@99.7,86.6 v1(99.7,86.2) 100.422,86.2 101.933,87.711 102.538,88.316 102.538,102.632 104.465,104.559 113.834,104.559 120.142,110.867 120.142,117.958 123.422,121.238 136.318,121.238 141.097,116.459 141.097,105.506 136.937,101.346 U2.9
NetU1_13: U1.13 U2.1 | length 57
  Top Layer w0.254: v1(102,85.4) 102,86.6 103.066,87.666 U1.13
  Bottom Layer w0.254: v1(102,85.4) 103.759,87.159 103.759,102.237 104.938,103.416 114.307,103.416 121.285,110.394 121.285,117.485 122.926,119.126 U2.1
NetU1_14: U1.14 U2.15 | length 70.6
  Top Layer w0.254: v1(102,83.7) 103,84.7 103,86.6 103.566,87.166 U1.14
  Bottom Layer w0.254: v1(102,83.7) 101,84.7 101,85.7 102.249,86.949 103.3,88 103.3,102.316 104.781,103.797 114.149,103.797 120.904,110.552 120.904,117.643 123.737,120.476 129.124,120.476 133.014,116.586 U2.15
NetU1_15: U1.15 U2.10 | length 97.3
  Top Layer w0.254: v2(102,82) 103.6,83.6 103.6,86.2 104.066,86.666 U1.15
  Bottom Layer w0.254: v2(102,82) 100.589,83.411 100.589,85.828 102.091,87.33 102.919,88.158 102.919,102.474 104.623,104.178 113.992,104.178 120.523,110.709 120.523,117.801 123.579,120.857 136.16,120.857 140.716,116.301 140.716,105.664 138.938,103.886 U2.10
NetU1_16: U1.16 U2.7 | length 48.9
  Top Layer w0.254: v1(104.521,81.5) 104.521,85.493 U1.16
  Bottom Layer w0.254: v1(104.521,81.5) 104.521,101.921 105.254,102.654 123.712,102.654 126.022,102.654 U2.7
NetU1_17: U1.17 U2.2 | length 61.3
  Top Layer w0.254: U1.17 v1(107,81.5)
  Bottom Layer w0.254: v1(107,81.5) 106.9,81.5 105.5,80.1 103.9,80.1 103.2,80.8 103.2,82.5 104.14,83.44 104.14,102.079 105.096,103.035 114.465,103.035 121.666,110.236 121.666,115.366 122.886,116.586 U2.2
NetU61_5: U61.5 U63.12 U64.12 U65.12 U66.12 U67.12 | length 94.8
  Top Layer w0.254: U61.5 69.891,38.821 70.16,38.552 70.16,38.521 70.835,37.846 74.992,37.846 82.804,45.658 82.804,61.214 85.09,63.5 U64.12
  Bottom Layer w0.254: U63.12 76.2,64.77 86.36,64.77 U64.12 88.9,64.77 99.06,64.77 U65.12 101.6,64.77 111.76,64.77 U66.12 114.3,64.77 124.46,64.77 U67.12 U67.12@125.476,63.5
NetU61_6: U61.6 U63.11 U64.11 U65.11 U66.11 U67.11 | length 95.7
  Top Layer w0.254: U61.6 70.541,38.679 70.993,38.227 71.47,38.227 74.834,38.227 82.423,45.816 82.423,61.118 81.311,62.23 76.2,62.23 U63.11
  Bottom Layer w0.254: U63.11 76.2,62.23 86.36,62.23 U64.11 88.9,62.23 99.06,62.23 U65.11 101.6,62.23 111.76,62.23 U66.11 114.3,62.23 124.46,62.23 U67.11
NetU61_7: U61.7 U63.2 U64.2 U65.2 U66.2 U67.2 | length 87
  Top Layer w0.254: U61.7 71.191,39.045 71.628,38.608 74.676,38.608 82.042,45.974 82.042,60.198 81.28,60.96 U64.2
  Bottom Layer w0.254: U63.2 68.58,59.69 78.74,59.69 U64.2 81.28,59.69 91.44,59.69 U65.2 93.98,59.69 104.14,59.69 U66.2 106.68,59.69 116.84,59.69 U67.2
NetU61_8: U61.8 U63.9 U64.9 U65.9 U66.9 U67.9 | length 76.4
  Top Layer w0.254: U61.8 71.841,42.377 73.279,43.815 75.727,43.815 77.851,45.939 77.851,54.229 76.2,55.88 U63.9
  Bottom Layer w0.254: U63.9 76.2,57.15 86.36,57.15 U64.9 88.9,57.15 99.06,57.15 U65.9 101.6,57.15 111.76,57.15 U66.9 114.3,57.15 124.46,57.15 U67.9
NetU61_9: U61.9 U63.4 U64.4 U65.4 U66.4 U67.4 | length 74.9
  Top Layer w0.254: U61.9 72.491,42.265 73.66,43.434 75.884,43.434 78.232,45.782 78.232,54.102 U64.4
  Bottom Layer w0.254: U63.4 68.58,54.61 78.74,54.61 U64.4 81.28,54.61 91.44,54.61 U65.4 93.98,54.61 104.14,54.61 U66.4 106.68,54.61 116.84,54.61 U67.4
NetU61_10: U61.10 U63.5 U64.5 U65.5 U66.5 U67.5 | length 72
  Top Layer w0.254: U61.10 73.141,42.153 74.041,43.053 76.042,43.053 78.613,45.624 78.613,51.943 U64.5
  Bottom Layer w0.254: U63.5 68.58,52.07 78.74,52.07 U64.5 81.28,52.07 91.44,52.07 U65.5 93.98,52.07 104.14,52.07 U66.5 106.68,52.07 116.84,52.07 U67.5
NetU61_11: U61.11 U63.6 U64.6 U65.6 U66.6 U67.6 | length 70.1
  Top Layer w0.254: U61.11 73.791,42.01 74.453,42.672 76.2,42.672 80.01,46.482 U64.6@80.01,50.673 ; U64.6@79.883,50.673 U64.6@80.01,50.673 ; U64.6@80.01,50.673 80.137,50.673 U64.6 U64.6@80.01,50.673
  Bottom Layer w0.254: U63.6 68.58,49.53 78.74,49.53 U64.6 81.28,49.53 91.44,49.53 U65.6 93.98,49.53 104.14,49.53 U66.6 106.172,51.562 110.831,51.562 112.863,49.53 113.705,49.53 115.062,49.53 116.84,49.53 U67.6
NetU61_12: U61.12 U63.1 | length 37.8
  Top Layer w0.254: U63.1 69.342,63.5 73.152,59.69 81.026,59.69 81.661,59.055 81.661,47.594 74.48,40.413 U61.12
NetU61_13: U61.13 U63.3 | length 15.9
  Top Layer w0.254: U63.3 69.85,58.42 73,55.27 73,49.936 74.441,48.495 U61.13
NetU61_14: U61.14 U63.10 | length 18
  Top Layer w0.254: U61.14 73.791,45.589 74.041,45.339 75.095,45.339 75.438,45.682 75.438,48.037 73.441,50.034 73.441,57.941 73.92,58.42 U63.10
NetU61_15: U61.15 U63.7 | length 11
  Top Layer w0.254: U61.15 73.141,45.477 73.66,44.958 75.253,44.958 76.708,46.413 76.708,49.022 U63.7
NetU61_16: U61.16 U63.8 | length 16.1
  Top Layer w0.254: U61.16 72.491,45.111 73.025,44.577 75.411,44.577 77.089,46.255 77.089,52.451 76.2,53.34 U63.8
NetU61_17: U61.17 U64.1 | length 36.4
  Top Layer w0.254: U61.17 71.841,50.556 71.841,53.302 71.841,54.397 69.088,57.15 66.294,57.15 65.786,57.658 65.786,64.208 66.348,64.77 78.74,64.77 U64.1
NetU61_18: U61.18 U64.3 | length 29.1
  Top Layer w0.254: U61.18 71.191,45.395 72.39,44.196 75.569,44.196 77.47,46.097 77.47,53.34 76.2,54.61 74.422,54.61 73.822,55.21 73.822,56.55 74.422,57.15 78.74,57.15 U64.3
NetU61_19: U61.19 U64.10 | length 51.8
  Top Layer w0.254: U61.19 70.612,47.034 70.612,50.992 70.612,53.086 69.088,54.61 66.294,54.61 65.405,55.499 65.405,64.366 66.19,65.151 88.011,65.151 88.9,64.262 88.9,59.69 U64.10
NetU61_20: U61.20 U64.7 | length 62.6
  Top Layer w0.254: U61.20 69.891,50.759 68.58,52.07 66.04,52.07 65.024,53.086 65.024,64.524 66.032,65.532 88.169,65.532 89.408,64.293 89.408,58.166 88.392,57.15 86.868,57.15 86.36,56.642 86.36,52.07 U64.7
NetU61_22: U61.22 U62.2 | length 66.9
  Top Layer w0.254: v1(64.262,48.768) 68.326,48.768 68.591,48.503 U61.22 ; U62.2 111.891,48.895 ; 111.891,48.899 111.891,48.895 ; v1(114.046,47.752) 112.903,48.895 111.891,48.895
  Bottom Layer w0.254: v1(64.262,48.768) 66.04,48.768 68.072,46.736 68.072,44.196 70.104,42.164 72.39,42.164 75.946,45.72 83.764,45.72 99.401,45.72 108.458,45.72 110.49,47.752 v1(114.046,47.752)
NetU62_5: U62.5 U64.8 | length 28.1
  Top Layer w0.254: U64.8 88.9,53.34 90.043,52.197 90.043,50.642 95.6,45.085 107.03,45.085 107.253,45.085 107.405,45.085 107.425,45.085 109.255,45.085 109.763,45.593 109.941,45.771 U62.5
NetU62_6: U62.6 U65.1 | length 36.8
  Top Layer w0.254: U65.1 91.44,63.5 90.424,62.484 90.424,50.8 95.758,45.466 106.872,45.466 107.583,45.466 109.035,45.466 109.291,45.722 U62.6
NetU62_7: U62.7 U65.3 | length 39.1
  Top Layer w0.254: U65.3 95.25,58.42 99.06,62.23 101.6,62.23 102.489,63.119 102.489,64.705 104.078,66.294 107.28,66.294 109.22,64.354 109.22,50.069 108.641,49.49 U62.7
NetU62_8: U62.8 U65.10 | length 32.8
  Top Layer w0.254: U65.10 101.6,58.42 102.87,59.69 102.87,64.548 104.235,65.913 107.123,65.913 108.839,64.197 108.839,50.227 107.991,49.379 U62.8
NetU62_9: U62.9 U65.7 | length 41.9
  Top Layer w0.254: U65.7@100.33,50.546 U65.7 99.314,50.8 98.806,51.308 98.806,53.594 99.822,54.61 101.854,54.61 103.251,56.007 103.251,64.39 104.393,65.532 106.965,65.532 108.458,64.039 108.458,50.384 107.341,49.267 U62.9
NetU62_10: U62.10 U65.8 | length 36.2
  Top Layer w0.254: U65.8 102.14,53.34 103.632,54.832 103.632,64.232 104.551,65.151 106.807,65.151 108.077,63.881 108.077,50.542 106.691,49.156 U62.10
NetU62_11: U62.11 U66.1 | length 18.3
  Top Layer w0.254: U66.1 105.664,63.5 107.696,61.468 107.696,50.7 106.041,49.045 U62.11
NetU62_12: U62.12 U66.3 | length 13
  Top Layer w0.254: U62.12 105.391,48.934 107.315,50.858 107.315,56.515 U66.3
NetU62_13: U62.13 U66.10 | length 29.7
  Top Layer w0.254: U62.13 105.391,42.907 107.188,44.704 115.032,44.704 115.57,45.242 115.57,47.752 114.046,49.276 113.03,49.276 112.331,49.974 111.506,50.8 111.506,56.896 U66.10
NetU62_14: U62.14 U66.7 | length 20.2
  Top Layer w0.254: U62.14 106.041,42.795 107.569,44.323 109.509,44.323 109.57,44.323 115.19,44.323 115.951,45.084 115.951,47.91 115.189,48.672 113.061,50.8 U66.7
NetU62_15: U62.15 U66.8 | length 22.7
  Top Layer w0.254: U62.15 106.691,42.755 107.878,43.942 109.666,43.942 109.728,43.942 115.348,43.942 116.332,44.926 116.332,48.068 115.57,48.83 115.57,50.8 U66.8
NetU62_16: U62.16 U67.1 | length 33.1
  Top Layer w0.254: U62.16 107.341,42.475 108.427,43.561 109.824,43.561 109.886,43.561 115.506,43.561 116.713,44.768 116.713,48.225 115.951,48.987 115.951,50.958 115.951,62.611 116.84,63.5 U67.1
NetU62_17: U62.17 U67.3 | length 27.5
  Top Layer w0.254: U62.17 107.991,42.205 108.966,43.18 109.982,43.18 110.044,43.18 115.664,43.18 117.094,44.61 117.094,48.383 116.332,49.145 116.332,51.116 116.332,57.912 116.84,58.42 U67.3
NetU62_18: U62.18 U67.10 | length 30.5
  Top Layer w0.254: U62.18 108.641,42.316 109.124,42.799 115.821,42.799 117.475,44.453 117.475,46.963 121.412,50.9 121.412,56.642 123.19,58.42 U67.10
NetU62_19: U62.19 U67.7 | length 32
  Top Layer w0.254: U62.19 109.291,41.981 109.728,42.418 115.979,42.418 117.856,44.295 117.856,46.736 123.698,52.578 123.698,53.848 124.46,54.61 126.746,54.61 127.508,53.848 127.508,51.308 127,50.8 U67.7
NetU62_20: U62.20 U67.8 | length 22.9
  Top Layer w0.254: U62.20 109.941,41.778 110.2,42.037 114.427,42.037 116.137,42.037 118.237,44.137 118.237,45.847 U67.8
SPI_CLK: PD1.3 U1.34 U54.5 | length 82.6
  Top Layer w0.254: U54.5 69.914,81.586 71.236,80.264 91.675,80.264 92.742,79.197 92.742,75.358 95.456,72.644 117.856,72.644 v1(119.126,73.914) 119.6,74.388 119.6,84.616 117.55,86.666 U1.34
  Bottom Layer w0.254: v1(119.126,73.914) 123.214,73.914 124.4,75.1 127.592,75.1 PD1.3
SPI_CS: U1.58 U54.3 | length 64.1
  Top Layer w0.254: U54.3 67.183,83.693 v1@67.564,83.312 ; v1(94.5,100.457) 94.757,100.2 95.014,100.457 99.241,100.457 105.525,100.457 107.582,100.457 109.143,100.457 109.994,99.606 109.994,97.794 U1.58
  Bottom Layer w0.254: v1(67.5,82.9) 67.6,82.8 87.4,82.8 95.496,90.896 95.496,99.461 v1(94.5,100.457)
SPI_SD: PD1.5 U1.35 U54.4 | length 90.7
  Top Layer w0.254: U54.4 66.377,82.423 68.917,79.883 91.517,79.883 92.361,79.039 92.361,75.2 95.298,72.263 120.015,72.263 ; U1.35 117.812,87.166 120.015,84.963 120.015,72.263 ; PD1.5 130.175,72.263 120.015,72.263
pads on no net: *1.15 *1.16 D1.3 D2.3 U1.8 U1.11 U1.27 U1.31 U1.32 U1.33 U1.36 U1.43 U1.44 U53.7 U62.22

## Polygon pours and split planes (outlines as drawn)
GND on Bottom Layer "Bottom Layer-No Net" (solid, pour order 1000): 56.5,127 56.5,70 148.5,70 148.5,127
GND on Bottom Layer "Bottom Layer-No Net" (solid, pour order 1000): 56.539,69.5 148.5,69.5 148.5,35 56.539,35
GND on Top Layer "Bottom Layer-No Net" (solid, remove dead copper, pour order 1001): 56.5,127 56.5,70 148.5,70 148.5,127
GND on Top Layer "Bottom Layer-No Net" (solid, pour order 1001): 56.5,69.5 148.5,69.5 148.5,35 56.5,35

## Silkscreen, mask and mechanical layers (free items; w line width, h text height)
Top Overlay:
  lines w0.254: 54.5,36.5 55.008,34.976 ; 54.5,125.452 55.008,126.976 ; 54.754,34.976 55.262,34.976 ; 54.754,126.976 55.262,126.976 ; 55.008,75.872 55.008,34.976 ; 55.008,86.08 55.008,126.976 ; 55.516,36.5 55.008,34.976 ; 55.516,125.452 55.008,126.976 ; 93.183,101.6 93.218,101.565 ; 93.197,80.645 93.218,80.666 ; 149.492,36.524 150,35 ; 149.492,67.976 150,69.5 ; 149.5,71.548 150.008,70.024 ; 149.5,125.5 150.008,127.024 ; 149.746,35 150.254,35 ; 149.746,69.5 150.254,69.5 ; 149.754,70.024 150.262,70.024 ; 149.754,127.024 150.262,127.024 ; 150,45.75 150,35 ; 150,58.75 150,69.5 ; 150.008,93.42 150.008,70.024 ; 150.008,103.628 150.008,127.024 ; 150.508,36.524 150,35 ; 150.508,67.976 150,69.5 ; 150.516,71.548 150.008,70.024 ; 150.516,125.5 150.008,127.024
  text "Ethernet" at 119.634,124.206 h1.52
  text "+12V" at 78.74,123.698 h1.52
  text "INPUT_PMT" at 70.104,104.648 h1.52
  text "Motors" at 142.494,103.886 h1.52 r90
  text "57 (mm)" at 150.922,93.674 h1.52 r90
  text "92 (mm)" at 55.922,76.126 h1.52 r90
  text "SPIDisplay" at 110.1,71.4 h1.52
  text "IR" at 76.2,71.12 h1.52
  text "34.5 (mm)" at 150.914,46.004 h1.52 r90
Top Solder:
  lines w0.254: 56.524,127.738 56.524,128.246 ; 58.048,127.484 56.524,127.992 ; 58.048,128.5 56.524,127.992 ; 97.42,127.992 56.524,127.992 ; 107.628,127.992 148.524,127.992 ; 147,127.484 148.524,127.992 ; 147,128.5 148.524,127.992 ; 148.524,127.738 148.524,128.246
  text "92 (mm)" at 97.674,127.078 h1.52

## Text inside footprints (layer, text, board x,y; h text height)
C100: Top Overlay "+" at 74.41,104.67 h1.5 r90
C101: Top Overlay "+" at 72.91,122.406 h1.5 r270
P1: Top Overlay "2" at 75.692,75.692 h1.27; Top Overlay "1" at 76.2,73.152 h1.27; Top Overlay "7" at 87.376,73.152 h1.27; Top Overlay "8" at 87.376,75.692 h1.27
PD: Top Overlay "2" at 86.106,42.672 h1.27; Top Overlay "1" at 86.614,40.132 h1.27; Top Overlay "9" at 100.33,40.132 h1.27; Top Overlay "10" at 100.33,42.672 h1.27
PD1: Top Overlay "10" at 138.176,75.692 h1.27; Top Overlay "9" at 138.176,73.152 h1.27; Top Overlay "1" at 124.46,73.152 h1.27; Top Overlay "2" at 123.952,75.692 h1.27